# Altium PCB PCB.PcbDoc
Units mm, origin at the board's own origin, x right, y up, seen from the top; angles counter-clockwise.
Board outline 33.65 x 28.85 mm, 2 copper layers (Top Layer, Bottom Layer); 59 components, 47 nets, 243 pads, 22 vias.
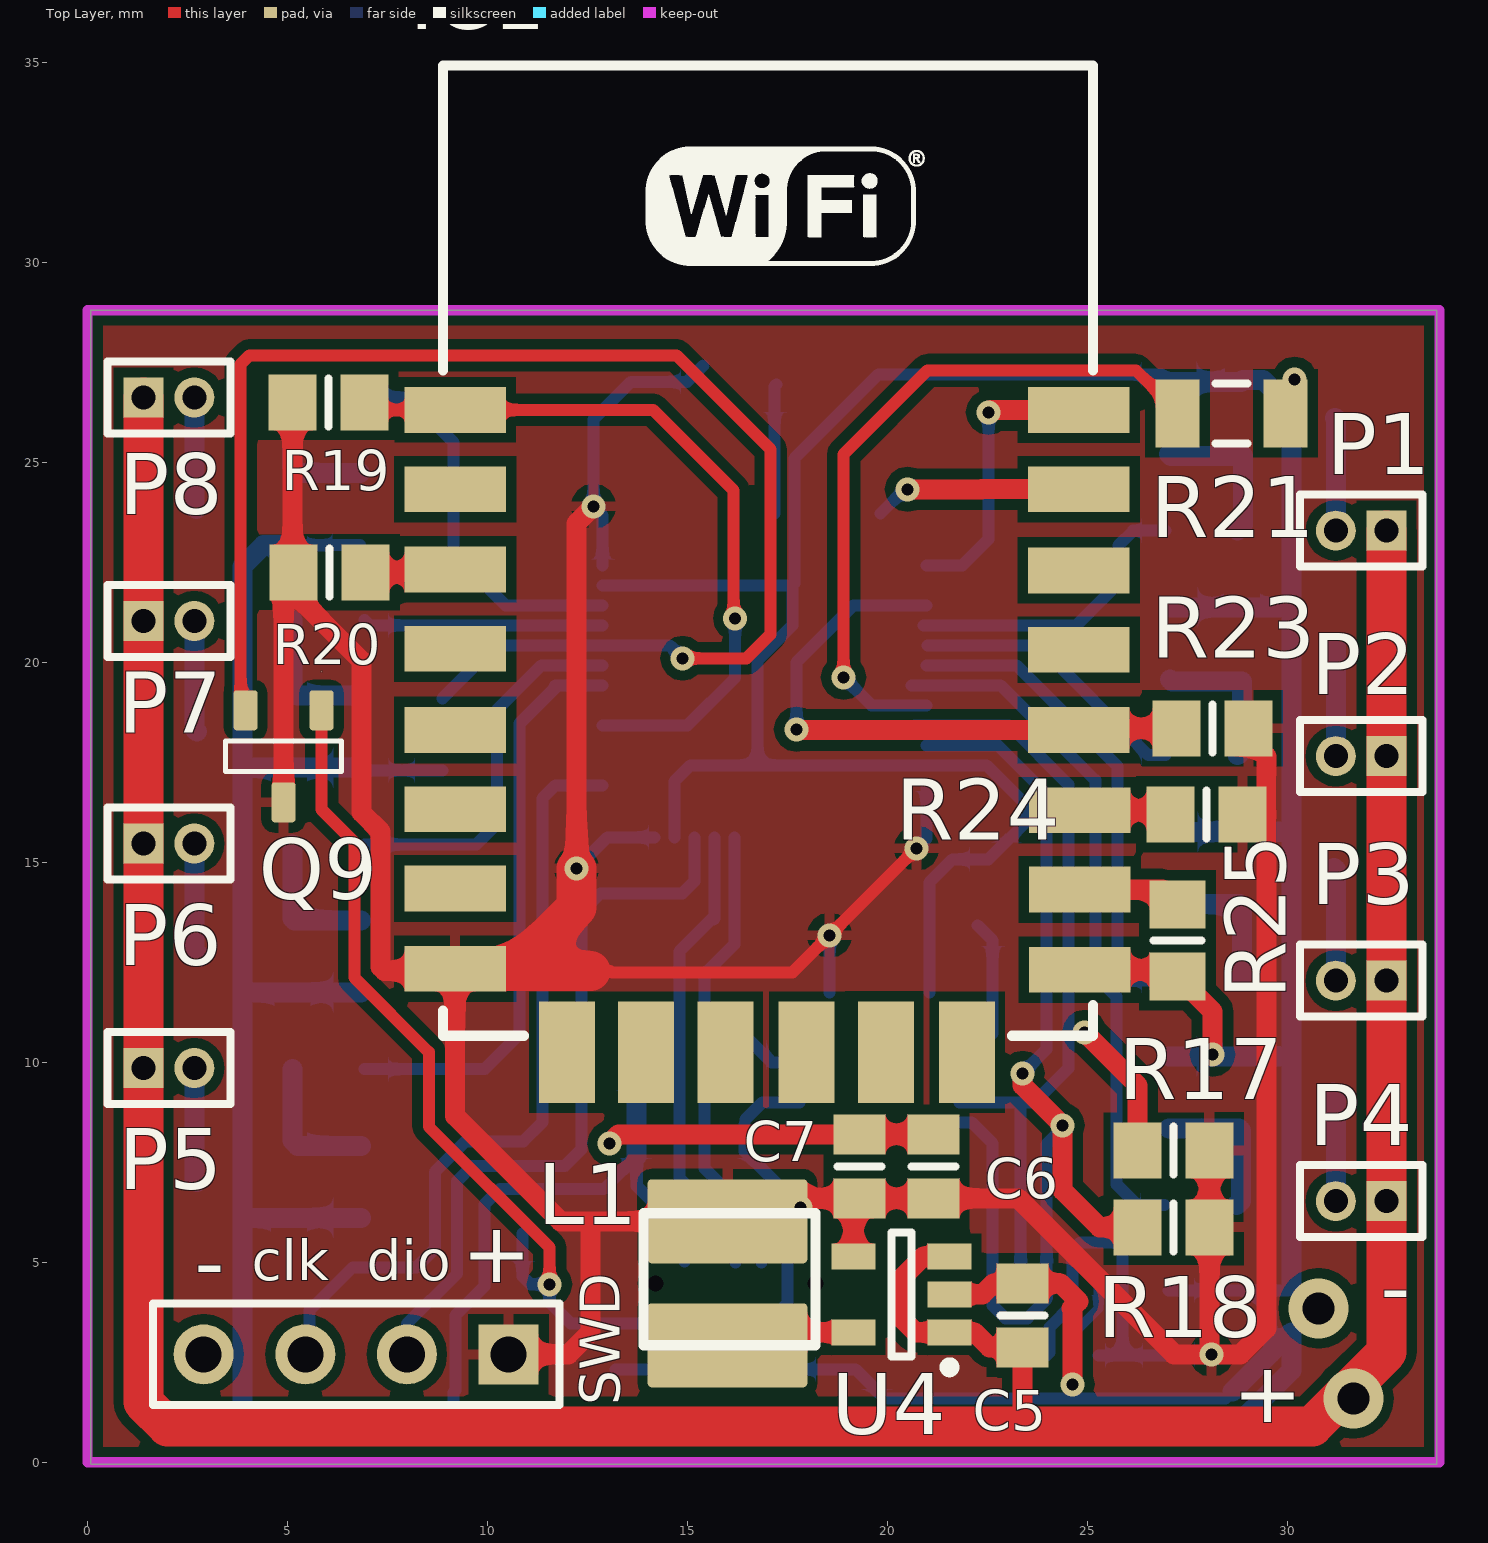
[diagram p0: Top Layer view]
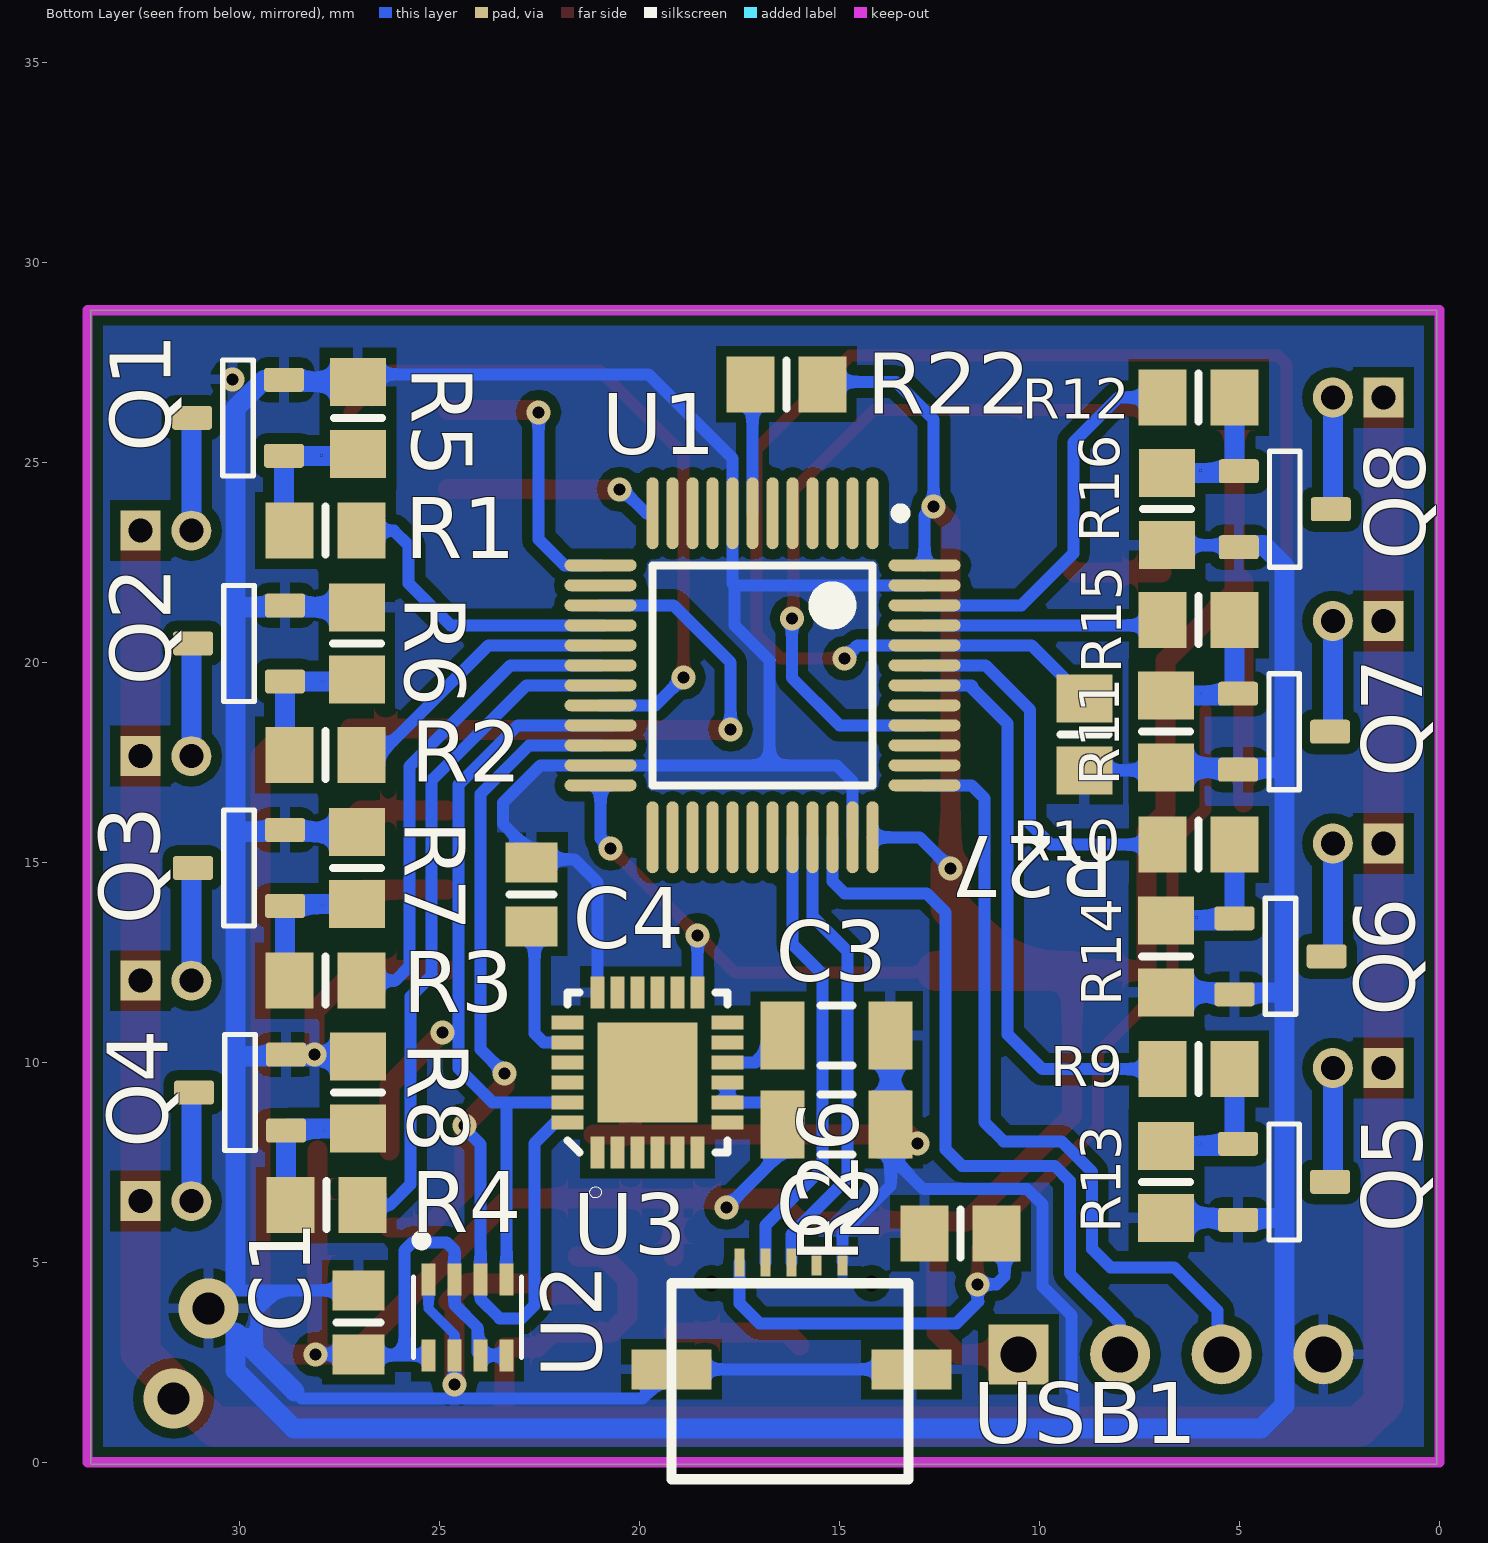
[diagram p1: Bottom Layer view, seen from below]

## Layer stack, top to bottom
Top Solder: solder mask 0.0102, Solder Resist, Dk 3.5
Top Layer: signal copper 0.0356
Dielectric 1: dielectric 0.32, FR-4, Dk 4.8
Bottom Layer: signal copper 0.0356
Bottom Solder: solder mask 0.0102, Solder Resist, Dk 3.5

## Board outline
0.075,-0.052 33.725,-0.052 33.725,28.798 0.075,28.798

## Design rules (kind name [scope] priority, off if disabled: settings)
Clearance [All] p1: gap=0.254
PolygonConnect [All] p1: connectstyle=Relief reliefconductorwidth=0.254 reliefentries=4 polygonreliefangle="90 Angle" airgapwidth=0.254
RoutingVias [All] p1: holewidth=0.711 width=1.27 viastyle="Through Hole" minholewidth=0.711 minwidth=1.27 maxholewidth=0.711 maxwidth=1.27
SolderMaskExpansion [All] p1: expansion=0.102
Width [All] p1: maxlimit=2 minlimit=0.254 preferedwidth=0.5
30 further rules are at their usual default settings.

## Classes and differential pairs
component class Potencia: C5 C6 C7 C? L1 P1 P2 P3 P4 P5 P6 P7 P8 P? Q1 Q2 Q3 Q4 Q5 Q6 Q7 Q8 Q? R1 R2 R3 R4 R5 R6 R7 R8 R9 R10 R11 R12 R13 R14 R15 R16 R? U4
component class Esquematico: C1 C2 C3 C4 C? IC1 Q9 R17 R18 R19 R20 R21 R22 R23 R24 R25 R26 R27 R? SWD U1 U2 U3 U? USB1

## Components (designator, comment, footprint, x,y, rotation, side; value= is the part's Value field where it differs from the comment)
C1 "Cap" 6-0805_L 27.025,3.498 r270 bottom
C2 "Cap" C1206 15.075,8.448 r0 bottom
C3 "Cap" C1206 15.075,10.673 r0 bottom
C4 "Cap" 6-0805_L 22.7,14.198 r270 bottom
C5 "Cap" 6-0805_L 23.375,3.673 r270 top
C6 "Cap" 6-0805_L 21.15,7.398 r270 top
C7 "Cap" 6-0805_L 19.3,7.398 r270 top
IC1 "ESP8266 ESP-12-E" "ESP8266 ESP-12-E B" 25.775,9.898 r0 top
L1 "Inductor Iron Dot" "Inductor CD43" 14,1.923 r0 top
P1 "MHDR1X2" MHDR1X2 32.477,23.29 r180 top
P2 "MHDR1X2" MHDR1X2 32.477,17.651 r180 top
P3 "MHDR1X2" MHDR1X2 32.477,12.038 r180 top
P4 "MHDR1X2" MHDR1X2 32.477,6.526 r180 top
P5 "MHDR1X2" MHDR1X2 1.398,9.854 r0 top
P6 "MHDR1X2" MHDR1X2 1.398,15.467 r0 top
P7 "MHDR1X2" MHDR1X2 1.398,21.03 r0 top
P8 "MHDR1X2" MHDR1X2 1.398,26.618 r0 top
Q1 "MOSFET-N" SOT23-3 30.038,26.109 r0 bottom
Q2 "MOSFET-N" SOT23-3 30.013,20.47 r0 bottom
Q3 "MOSFET-N" SOT23-3 30.013,14.857 r0 bottom
Q4 "MOSFET-N" SOT23-3 29.988,9.244 r0 bottom
Q5 "MOSFET-N" SOT23-3 3.887,7.009 r180 bottom
Q6 "MOSFET-N" SOT23-3 3.975,12.648 r180 bottom
Q7 "MOSFET-N" SOT23-3 3.887,18.261 r180 bottom
Q8 "MOSFET-N" SOT23-3 3.869,23.824 r180 bottom
Q9 "SI2306DS" SOT23-3 4.9,17.648 r270 top
R1 "Res3" 6-0805_N 27.854,23.29 r180 bottom
R2 "Res3" 6-0805_N 27.854,17.676 r180 bottom
R3 "Res3" 6-0805_N 27.854,12.038 r180 bottom
R4 "Res3" 6-0805_N 27.829,6.424 r180 bottom
R5 "Res3" 6-0805_N 27.041,26.109 r270 bottom
R6 "Res3" 6-0805_N 27.067,20.47 r270 bottom
R7 "Res3" 6-0805_N 27.067,14.857 r270 bottom
R8 "Res3" 6-0805_N 27.041,9.244 r270 bottom
R9 "Res3" 6-0805_N 6.021,9.829 r0 bottom
R10 "Res3" 6-0805_N 6.021,15.442 r0 bottom
R11 "Res3" 6-0805_N 6.021,21.055 r0 bottom
R12 "Res3" 6-0805_N 6.021,26.618 r0 bottom
R13 "Res3" 6-0805_N 6.834,7.009 r90 bottom
R14 "Res3" 6-0805_N 6.834,12.648 r90 bottom
R15 "Res3" 6-0805_N 6.834,18.261 r90 bottom
R16 "Res3" 6-0805_N 6.815,23.824 r90 bottom
R17 "Res3" 6-0805_N 27.15,7.798 r180 top
R18 "Res3" 6-0805_N 27.15,5.873 r180 top
R19 "Res3" 6-0805_N 6.025,26.498 r180 top
R20 "Res3" 6-0805_N 6.05,22.248 r180 top
R21 "Res3" C1206 28.6,26.223 r0 top
R22 "Res3" 6-0805_N 16.325,26.948 r180 bottom
R23 "Res3" 6-0805_N 28.125,18.348 r0 top
R24 "Res3" 6-0805_N 27.975,16.198 r180 top
R25 "Res3" 6-0805_N 27.25,13.048 r90 top
R26 "Res3" 6-0805_N 11.975,5.723 r0 bottom
R27 "Res3" 6-0805_N 8.875,18.198 r270 bottom
SWD "Header 4" HDR1X4 10.525,2.698 r180 top (schematic designator P9)
U1 "STM32F103C8T6" LQFP48_N 16.925,19.673 r270 bottom
U2 "BMP280" LGA-8_BMP280(Primary) 24.3,3.623 r90 bottom
U3 "MPU-6050" QFN50P400X400X95-25N 19.8,9.748 r90 bottom
U4 "LM3671MF-3.3/NOPB" MF05A_N 20.35,4.198 r180 top
USB1 "Micro_USB" "Micro USB" 18.2,4.473 r180 bottom

## Footprints (in the part's own frame and the unit in brackets; to place one, negate y for a bottom-side part, rotate by r counter-clockwise, add the part's x,y. Pads: shape width x height; smd on the part's side, far side on the other; paste and mask are expansions set on the pad)
6-0805_L [mm] "Chip Resistor, Body 2.0x1.2mm, IPC High Density"
  rect 1x1.3 smd: 1(-0.8,0) 2(0.8,0)
  silkscreen extent 0,-0.55 0,0.55, body extent -1.07,-0.7 1.07,0.7, height 0.7
6-0805_N [mm] "Chip Resistor, Body 2.0x1.2mm, IPC Medium Density"
  rect 1.2x1.4 smd: 1(-0.9,0) 2(0.9,0)
  silkscreen extent 0,-0.6 0,0.6, body extent -1.07,-0.7 1.07,0.7, height 0.7
C1206 [mm] "Chip Capacitor, Body 3.2x1.6mm, IPC High Density"
  rect 1.1x1.7 smd: 1(-1.35,0) 2(1.35,0)
  silkscreen extent -0.4,-0.75 0.4,0.75, body extent -1.7,-0.9 1.7,0.9, height 1.3
"ESP8266 ESP-12-E B" [mil] "ESP8266 ESP-12-E"
  rect 100x45 smd: 1(-653,646) 2(-653,568) 3(-653,489) 4(-653,411) 5(-653,331) 6(-653,253) 7(-653,175) 8(-653,96) 15(-38,95) 16(-38,174) 17(-38,252) 18(-39,331) 19(-39,410) 20(-39,488) 21(-39,568) 22(-39,646)
  rect 55x100 smd: 9(-543,14) 10(-465,14) 11(-387,14) 12(-307,14) 13(-229,14) 14(-149,14)
  silkscreen extent -665,30 -25,985
HDR1X4 [mm] "Connector; Header; 4 Position"
  rect 1.5x1.5 hole 0.9: 1(0,0)
  round 1.5 hole 0.9: 2(2.54,0) 3(5.08,0) 4(7.62,0)
  silkscreen extent -1.27,-1.27 8.89,1.27
"Inductor CD43" [mm] "4.5mm * 4mm"
  rrect10% 4x2.1 smd: 1(2,1) 2(2,4.1)
  silkscreen extent -0.1,1 4.2,4.3
LGA-8_BMP280(Primary) [mm]
  rect 0.8x0.35 smd paste-25.4 mask-25.4: 1(0.95,0.975) 2(0.95,0.325) 3(0.95,-0.325) 4(0.95,-0.975) 5(-0.95,-0.975) 6(-0.95,-0.325) 7(-0.95,0.325) 8(-0.95,0.975)
  silkscreen extent -1,-1.35 2.02,1.35
LQFP48_N [mm] "Thin QFP, 48-Leads, Body 7x7mm, Pitch 0.5mm, IPC Medium Density"
  oval 1.8x0.3 smd: 1(-4.05,2.75) 2(-4.05,2.25) 3(-4.05,1.75) 4(-4.05,1.25) 5(-4.05,0.75) 6(-4.05,0.25) 7(-4.05,-0.25) 8(-4.05,-0.75) 9(-4.05,-1.25) 10(-4.05,-1.75) 11(-4.05,-2.25) 12(-4.05,-2.75) 25(4.05,-2.75) 26(4.05,-2.25) 27(4.05,-1.75) 28(4.05,-1.25) 29(4.05,-0.75) 30(4.05,-0.25) 31(4.05,0.25) 32(4.05,0.75) 33(4.05,1.25) 34(4.05,1.75) 35(4.05,2.25) 36(4.05,2.75)
  oval 0.3x1.8 smd: 13(-2.75,-4.05) 14(-2.25,-4.05) 15(-1.75,-4.05) 16(-1.25,-4.05) 17(-0.75,-4.05) 18(-0.25,-4.05) 19(0.25,-4.05) 20(0.75,-4.05) 21(1.25,-4.05) 22(1.75,-4.05) 23(2.25,-4.05) 24(2.75,-4.05) 37(2.75,4.05) 38(2.25,4.05) 39(1.75,4.05) 40(1.25,4.05) 41(0.75,4.05) 42(0.25,4.05) 43(-0.25,4.05) 44(-0.75,4.05) 45(-1.25,4.05) 46(-1.75,4.05) 47(-2.25,4.05) 48(-2.75,4.05)
  silkscreen extent -4.17,-2.75 2.75,3.57, body extent -3.5,-3.5 3.5,3.5, height 1.6
MF05A_N [mm] "SOT23, 5-Leads, Body 2.9x1.6mm, Pitch 0.95mm, Lead Span 2.8mm, IPC Medium Density"
  rect 1.1x0.65 smd: 1(-1.2,0.95) 2(-1.2,0) 3(-1.2,-0.95) 4(1.2,-0.95) 5(1.2,0.95)
  silkscreen extent -1.33,-1.55 0.25,1.95, body extent -0.9,-1.55 0.9,1.55, height 1.19
MHDR1X2 [mm] "Connector; Header; 2 Position"
  rect 1x1 hole 0.6: 1(0,0)
  round 1 hole 0.6: 2(1.27,0)
  silkscreen extent -0.9,-0.9 2.17,0.9
"Micro USB" [mm]
  round 0 hole 0.4: 0(0,0) 0(4,0)
  rect 0.25x0.7 smd: 1(0.7,0.525) 2(1.35,0.525) 3(2,0.525) 4(2.625,0.55) 5(3.275,0.55)
  rect 2x1 smd: 6(-1,-2.15) 6(5,-2.15)
  silkscreen extent -1,-4.9 4.92,0
QFN50P400X400X95-25N [mm]
  rect 0.8x0.35 smd paste-25.4 mask-25.4: 1(-2,1.25) 2(-2,0.75) 3(-2,0.25) 4(-2,-0.25) 5(-2,-0.75) 6(-2,-1.25) 13(2,-1.25) 14(2,-0.75) 15(2,-0.25) 16(2,0.25) 17(2,0.75) 18(2,1.25)
  rect 0.35x0.8 smd paste-25.4 mask-25.4: 7(-1.25,-2) 8(-0.75,-2) 9(-0.25,-2) 10(0.25,-2) 11(0.75,-2) 12(1.25,-2) 19(1.25,2) 20(0.75,2) 21(0.25,2) 22(-0.25,2) 23(-0.75,2) 24(-1.25,2)
  rect 2.5x2.5 smd mask-25.4: 25(0,0)
  silkscreen extent -3.14,-2 2,2
SOT23-3 [mm] "SOT23, 3 pin"
  round 0.5 on Mech15: 0(0,0)
  rrect25% 1x0.6 smd: 1(-1.15,0.95) 2(-1.15,-0.95) 3(1.15,0)
  silkscreen extent -0.38,-1.45 0.38,1.45, body extent -1.4,-1.45 1.4,1.45, height 1.29

## Part data
C1 C2 C3 C4 C5 C6 C7: "Capacitor"
L1: "Magnetic-Core Inductor with Winding Polarity Marking"
P1 P2 P3 P4 P5 P6 P7 P8: "Header, 2-Pin"
Q1 Q2 Q3 Q4 Q5 Q6 Q7 Q8: "N-Channel MOSFET"
R1 R2 R3 R4 R5 R6 R7 R8 R9 R10 R11 R12 R13 R14 R15 R16 R17 R18 R19 R20 R21 R22 R23 R24 R25 R26 R27: "Resistor"
SWD: "Header, 4-Pin"
U1: "STM32 ARM-based 32-bit MCU with 64 Kbytes Flash, 48-pin LQFP, Industrial Temperature"
U2: "Barometro"
U4: "2MHz, 600mA Step-Down DC-DC Converter, 5-pin SOT-23, Pb-Free"

## Via types
v1: diameter 0.6, hole 0.3, Top Layer to Bottom Layer, 20 vias
v2: diameter 1.5, hole 0.8, Top Layer to Bottom Layer, 2 vias

## Nets (pads, with @x,y where several pads share a name; then routed paths per layer and width w, separated by ;. In a path a pad name is that pad's centre, name@x,y a point inside that pad or via, vN(x,y) a via of type N, cw(c..) or ccw(c..) an arc to the next point about the centre after c; other vN are vias at no path point)
BOOT_0: Q9.2 R27.1 U1.44 | length 36.8
  Top Layer w0.3: Q9.2 3.825,18.923 3.825,27.448 4.05,27.673 14.725,27.673 17.075,25.323 17.075,20.698 16.475,20.098 v1(14.875,20.098)
  Bottom Layer w0.3: R27.1 10.2,20.423 U1.44 14.55,20.423 v1(14.875,20.098)
BOOT_ESP: IC1.18 R23.1 U1.15 | length 15
  Top Layer w0.5: v1(17.725,18.323) 17.743,18.305 IC1.18 24.827,18.348 R23.1
  Bottom Layer w0.3: v1(17.725,18.323) 17.725,19.998 19.15,21.423 U1.15
GND: C1.1 C2.1 C3.1 C4.1 C5.1 C6.1 C7.1 IC1.15 Q1.2 Q2.2 Q3.2 Q4.2 Q5.2 Q6.2 Q7.2 Q8.2 R5.1 R6.1 R7.1 R8.1 R13.1 R14.1 R15.1 R16.1 R21.2 R25.1 R26.2 R27.2 SWD.4 U1.8 U1.23 U1.35 U1.47 U2.1 U2.7 U3.18 U4.2 USB1.5 USB1.6 | length 198.9
  Top Layer w0.5: v1(13.05,7.973) 13.275,8.198 C7.1 C6.1 ; U4.2 22.375,4.198 22.65,4.473 C5.1 24.325,4.473 24.775,4.023 24.6,3.848 24.626,3.821 v1(24.626,1.948) ; IC1.15 27.087,12.311 R25.1 28.125,11.273 v1(28.125,10.198)
  Bottom Layer w0.254: 24.625,1.598 U2.7 24.625,3.192 25.275,3.842 U2.1
  Bottom Layer w0.3: Q8.2 5.069,22.924 R16.1 ; R15.1 6.898,17.298 R27.2 ; 9.125,0.848 9.15,0.873 9.15,1.748 9.2,1.798 9.2,3.673 9.925,4.398 9.925,6.444 10.308,6.827 12.904,6.827 13.725,7.648 13.725,6.91 14.925,5.71 USB1.5 ; U1.47 17.625,21.923 ; USB1.6@13.2,2.323 19.2,2.323 19.925,1.598 24.625,1.598 ; U1.35 14.675,17.023 15.075,17.423 16.75,17.423 ; U3.18 21.05,14.498 21.625,15.073 22.525,15.073 23.417,15.965 23.417,16.48 22.475,17.423 U1.23 16.75,17.423 ; 24.626,1.598 28.45,1.598 28.625,1.773 ; C1.1 29.05,4.298 ; R5.1 26.853,27.198 19.775,27.198 17.675,25.098 U1.8 17.675,21.973 17.625,21.923 ; 29.575,2.723 29.575,3.773 29.05,4.298 ; 30.1,4.398 30,4.298 29.05,4.298 ; 16.75,17.423 16.75,20.048 17.625,20.923 17.625,21.923
  Bottom Layer w0.5: 3.925,6.048 3.987,6.109 R13.1 ; Q8.2@5.069,22.924 4.401,22.924 3.875,22.398 3.875,17.298 ; R14.1 3.9,11.748 3.875,11.723 ; R15.1 3.939,17.361 3.875,17.298 ; C2.1@13.725,7.648 C2.1 C3.1 ; R8.1 30.071,10.144 30.1,10.173 ; R5.1 28.838,27.009 Q1.2 29.388,27.059 30.1,26.348 30.1,21.423 ; R7.1 30.034,15.757 30.1,15.823 ; R6.1 30.048,21.37 30.1,21.423 ; 28.625,1.773 29.575,2.723 30.1,3.248 30.1,2.298 28.65,0.848 9.125,0.848 4.45,0.848 3.875,1.423 3.875,11.723 ; 30.1,4.398 30.1,10.173 ; 3.875,11.723 3.875,17.298 ; 30.1,10.173 30.1,15.823 ; 30.1,15.823 30.1,21.423
  other v1: 30.175,27.073
  other v2: 30.775,3.848
"MOTOR 0": P1.2 Q1.3 | length 2.8
  Bottom Layer w0.5: Q1.3 31.207,26.091 P1.2
"MOTOR 1": P2.2 Q2.3 | length 2.8
  Bottom Layer w0.5: Q2.3 31.207,20.427 P2.2
"MOTOR 2": P3.2 Q3.3 | length 2.8
  Bottom Layer w0.5: Q3.3 31.207,14.813 P3.2
"MOTOR 3": P4.2 Q4.3 | length 2.7
  Bottom Layer w0.5: Q4.3 31.207,9.174 P4.2
"MOTOR 4": P5.2 Q5.3 | length 2.9
  Bottom Layer w0.5: P5.2 2.668,7.078 Q5.3
"MOTOR 5": P6.2 Q6.3 | length 2.9
  Bottom Layer w0.5: P6.2 2.668,12.804 Q6.3
"MOTOR 6": P7.2 Q7.3 | length 2.8
  Bottom Layer w0.5: P7.2 2.668,18.331 Q7.3
"MOTOR 7": P8.2 Q8.3 | length 2.8
  Bottom Layer w0.5: P8.2 2.668,23.875 Q8.3
NetC3_2: C3.2 U3.10 | length 1.7
  Bottom Layer w0.3: C3.2 17.1,9.998 U3.10
NetC4_2: C4.2 U3.20 | length 3.8
  Bottom Layer w0.3: U3.20 22.4,10.498 22.625,10.723 22.625,13.048 C4.2@22.25,13.423
NetIC1_3: IC1.3 R20.1 | length 2.3
  Top Layer w0.5: R20.1 9.118,22.248 IC1.3
NetIC1_16: IC1.16 R25.2 | length 2.6
  Top Layer w0.5: IC1.16 26.88,14.317 R25.2
NetIC1_17: IC1.17 R24.2 | length 2.3
  Top Layer w0.5: IC1.17 26.974,16.298 R24.2
NetL1_1: L1.1 U4.5 | length 3.3
  Top Layer w0.5: L1.1 16.325,3.248 U4.5
NetQ1_2: Q1.1 R1.1 R5.2 | length 3.8
  Bottom Layer w0.5: R5.2 27.091,25.159 Q1.1 28.888,23.424 R1.1
NetQ2_2: Q2.1 R2.1 R6.2 | length 3.7
  Bottom Layer w0.5: R6.2 27.117,19.52 Q2.1 28.863,17.785 R2.1
NetQ3_2: Q3.1 R3.1 R7.2 | length 3.7
  Bottom Layer w0.5: R7.2 28.813,13.957 Q3.1 28.863,12.147 R3.1
NetQ4_2: Q4.1 R4.1 R8.2 | length 3.7
  Bottom Layer w0.5: R8.2 28.788,8.344 Q4.1 28.838,6.533 R4.1
NetQ5_2: Q5.1 R9.1 R13.2 | length 3.6
  Bottom Layer w0.5: R9.1 5.121,8.043 5.255,7.909 R13.2
NetQ6_2: Q6.1 R10.1 R14.2 | length 3.6
  Bottom Layer w0.5: R10.1 5.121,13.602 Q6.1 5.175,13.548 R14.2
NetQ7_2: Q7.1 R11.1 R15.2 | length 3.5
  Bottom Layer w0.5: R11.1 5.121,19.295 5.255,19.161 R15.2
NetQ8_2: Q8.1 R12.1 R16.2 | length 3.5
  Bottom Layer w0.5: R12.1 5.121,24.876 5.273,24.724 R16.2
NetR21_1: R21.1 U1.20 | length 17.6
  Top Layer w0.3: v1(18.9,19.623) 18.9,25.198 21,27.298 26.206,27.298 27.25,26.253 R21.1
  Bottom Layer w0.3: v1(18.9,19.623) 19.6,18.923 U1.20
NRST: R22.1 U1.7 | length 3.2
  Bottom Layer w0.3: U1.7 17.175,26.898 R22.1
PWM0: R1.2 U1.16 | length 7.6
  Bottom Layer w0.3: U1.16@20.9,20.923 24.725,20.923 25.775,21.973 25.775,22.923 26.142,23.29 R1.2
PWM1: R2.2 U1.17 | length 7.1
  Bottom Layer w0.3: U1.17@21,20.423 23.775,20.423 26.521,17.676 R2.2
PWM2: R3.2 U1.18 | length 12.2
  Bottom Layer w0.3: U1.18 23.225,19.923 25.75,17.398 25.75,12.398 26.11,12.038 R3.2
PWM3: R4.2 U1.19 | length 17.3
  Bottom Layer w0.3: U1.19@20.6,19.423 22.825,19.423 25.196,17.052 25.196,12.168 25.725,11.639 25.725,6.948 26.248,6.424 R4.2
PWM4: R9.2 U1.42 | length 14.5
  Bottom Layer w0.3: R9.2 9.931,9.829 10.8,10.698 10.8,18.469 11.7,19.369 ; 11.673,19.396 11.7,19.423 U1.42
PWM5: R10.2 U1.43 | length 9.5
  Bottom Layer w0.3: R10.2 9.719,15.442 10.238,15.96 10.238,18.81 11.35,19.923 U1.43
PWM6: R11.2 U1.45 | length 6
  Bottom Layer w0.3: R11.2 7.054,20.923 U1.45
PWM7: R12.2 U1.46 | length 9.7
  Bottom Layer w0.3: R12.2 8.03,26.618 9.15,25.498 9.15,22.723 10.45,21.423 U1.46
RST: IC1.1 R19.1 U1.40 | length 18.6
  Top Layer w0.3: R19.1 7.117,26.306 IC1.1 14.142,26.306 16.15,24.298 v1@16.15,21.098
  Bottom Layer w0.3: U1.40 15,18.423 16.19,19.612 v1(16.19,21.098)
RX: IC1.22 U1.13 | length 7.3
  Top Layer w0.5: v1(22.525,26.248) 22.583,26.306 IC1.22
  Bottom Layer w0.3: U1.13 21.875,22.423 22.525,23.073 v1(22.525,26.248)
SCL: R17.2 U1.21 U2.4 U3.23 | length 22.6
  Top Layer w0.5: v1(24.925,10.748) 26.25,9.423 R17.2
  Bottom Layer w0.3: U1.21@20.675,18.423 U1.21 23.042,18.423 24.525,16.939 24.525,9.848 23.675,8.998 23.3,8.998 ; U3.23 23.3,8.998 ; U2.4 23.325,8.973 23.3,8.998
SDA: R18.2 U1.22 U2.3 U3.24 | length 27.3
  Top Layer w0.5: v1(23.375,9.723) 23.375,9.423 v1(24.375,8.423) 24.375,6.798 25.3,5.873 R18.2
  Bottom Layer w0.3: U1.22 22.758,17.923 23.971,16.71 23.971,10.319 v1(23.375,9.723) ; U3.24 22.1,8.498 22.625,7.973 22.625,3.923 22.95,3.598 23.496,3.598 23.975,4.076 U2.3 23.975,7.948 v1@24.225,8.198
SWCLK: SWD.3 U1.37 | length 19.4
  Bottom Layer w0.3: SWD.3@5.547,3.071 5.547,3.787 6.633,4.873 8.225,4.873 8.688,5.335 8.688,7.26 9.45,8.023 10.898,8.023 11.375,8.5 11.375,16.598 11.7,16.923 U1.37
SWDIO: SWD.2 U1.34 | length 18.5
  Bottom Layer w0.3: SWD.2 7.985,3.458 9.242,4.714 9.242,7.031 9.621,7.41 11.938,7.41 12.346,7.819 12.346,13.744 12.825,14.223 14.875,14.223 15.175,14.523 U1.34
TX: IC1.21 U1.12 | length 5.2
  Top Layer w0.5: v1(20.5,24.323) 22.35,24.323 22.352,24.325 IC1.21
  Bottom Layer w0.3: 19.829,23.723 20.429,24.323 v1(20.5,24.323)
USB_DM: U1.32 USB1.2 | length 11.5
  Bottom Layer w0.3: U1.32 16.175,12.948 15.425,12.198 15.425,7.348 16.85,5.923 USB1.2
USB_DP: U1.33 USB1.3 | length 11.6
  Bottom Layer w0.3: 15.621,13.592 14.8,12.771 14.8,7.098 16.2,5.698 USB1.3 ; 15.648,13.565 15.675,13.592 U1.33
VCC: C1.2 C2.2 C6.2 C7.2 IC1.8 L1.2 Q9.3 R17.1 R18.1 R19.2 R20.2 R22.2 R23.2 R24.1 SWD.1 U1.24 U1.36 U1.48 U2.2 U2.5 U2.6 U2.8 U3.8 U3.9 U3.13 U4.4 | length 129.5
  Top Layer w0.3: 12.571,12.286 13.066,12.286 13.108,12.244 17.621,12.244 v1(20.725,15.348)
  Top Layer w0.5: Q9.3 4.9,22.023 R20.2@5.125,22.248 ; R19.2 R20.2@5.125,22.248 ; SWD.1 12.025,2.698 12.575,3.248 12.575,5.998 12.55,6.023 ; v1(12.225,14.848) 12.225,23.473 v1(12.65,23.898) ; U4.4 19.15,6.448 C7.2 ; R17.1 R18.1 28.05,2.748 v1(28.1,2.698) ; R23.2@28.875,18.248 29.475,17.648 29.475,3.348 28.825,2.698 v1(28.1,2.698) ; R20.2@5.125,22.248 5.125,21.765 6.85,20.04 6.85,16.243 7.329,15.764 7.329,12.382 7.425,12.286 9.189,12.286 9.189,8.659 11.825,6.023 12.55,6.023 ; 12.55,6.023 L1.2 16.575,6.598 C7.2 ; C7.2 C6.2 23.266,6.598 27.166,2.698 v1(28.1,2.698)
  Top Layer w1: IC1.8@9.189,12.286 10.638,12.286 ; v1(12.225,14.848) 12.225,13.873 10.638,12.286 ; 12.571,12.286 10.638,12.286
  Bottom Layer w0.3: v1(12.225,14.848) 13,15.623 U1.36 ; U1.48 12.875,23.673 v1(12.65,23.898) 12.65,26.073 13.588,27.011 14.988,27.011 R22.2@15.4,27.423 ; C2.2 16.425,7.773 v1(17.825,6.373) ; C2.2@16.45,8.573 16.875,8.998 U3.8 U3.9 ; U3.13 v1(18.55,13.173) ; v1(20.725,15.348) 20.975,15.598 U1.24@20.975,16.869 ; U2.5 U2.6 24.046,2.744 24.046,3.364 24.625,3.943 U2.2 24.625,5.298 24.825,5.498 25.675,5.498 25.875,5.298 25.875,2.673 ; U2.8 25.875,2.673 ; v1(28.1,2.698) C1.2 27,2.673 25.875,2.673
VCC_BAT: C5.2 P1.1 P2.1 P3.1 P4.1 P5.1 P6.1 P7.1 P8.1 U4.1 U4.3 | length 85.5
  Top Layer w0.5: U4.3 20.9,5.148 20.3,4.548 20.3,3.648 20.7,3.248 U4.1 22.175,3.248 22.55,2.873 C5.2 23.375,0.894
  Top Layer w1: P8.1 P7.1 P6.1 P5.1 1.398,1.499 2.003,0.894 23.375,0.894 30.622,0.894 32.477,2.749 P4.1 P3.1 P2.1 P1.1
  other v2: 31.65,1.598
VCC_USB: Q9.1 R26.1 USB1.1 | length 26.4
  Top Layer w0.3: Q9.1 5.85,16.319 6.675,15.494 6.675,12.111 8.535,10.251 8.535,8.388 11.55,5.373 v1(11.55,4.448)
  Bottom Layer w0.3: R26.1@10.875,5.723 10.875,4.648 11.075,4.448 v1(11.55,4.448) 11.55,4.048 11.525,4.023 12.075,3.473 17,3.473 17.5,3.973 USB1.1
pads on no net: IC1.2 IC1.4 IC1.5 IC1.6 IC1.7 IC1.9 IC1.10 IC1.11 IC1.12 IC1.13 IC1.14 IC1.19 IC1.20 Q1.0 Q2.0 Q3.0 Q4.0 Q5.0 Q6.0 Q7.0 Q8.0 Q9.0 U1.1 U1.2 U1.3 U1.4 U1.5 U1.6 U1.9 U1.10 U1.11 U1.14 U1.25 U1.26 U1.27 U1.28 U1.29 U1.30 U1.31 U1.38 U1.39 U1.41 U3.1 U3.2 U3.3 U3.4 U3.5 U3.6 U3.7 U3.11 U3.12 U3.14 U3.15 U3.16 U3.17 U3.19 U3.21 U3.22 U3.25 USB1.0 USB1.4

## Polygon pours and split planes (outlines as drawn)
GND on Bottom Layer "Plano_GND" (solid, pour order 6): 0,28.798 0,0 33.8,0 33.8,28.798
VCC on Top Layer "Plano_VCC" (solid, pour order 10): 0,0 34.025,0 34.025,28.798 0,28.798

## Keep-outs
Keep-Out Layer:
  lines w0.256: 0,0 0,28.798 33.8,28.798 33.8,0 0,0

## Silkscreen, mask and mechanical layers (free items; w line width, h text height)
Top Overlay:
  text "+" at 11.1,5.798 h1.52 r180
  text "-" at 3.425,5.398 h1.52 r180
  text "-" at 33.075,4.773 h1.52 r180
  text "clk" at 4.1,4.548 h1
  text "dio" at 6.975,4.548 h1
  text "+" at 30.375,2.298 h1.52 r180

## Text inside footprints (layer, text, board x,y; h text height)
IC1: Mechanical 13 "ANTENNA AREA" at 9.19,34.297 h0.25; Mechanical 13 "CUTOUT POLYGON" at 9.19,33.789 h0.25